# EAGLE board esp8266-incubator-panelized (EAGLE 6.4)
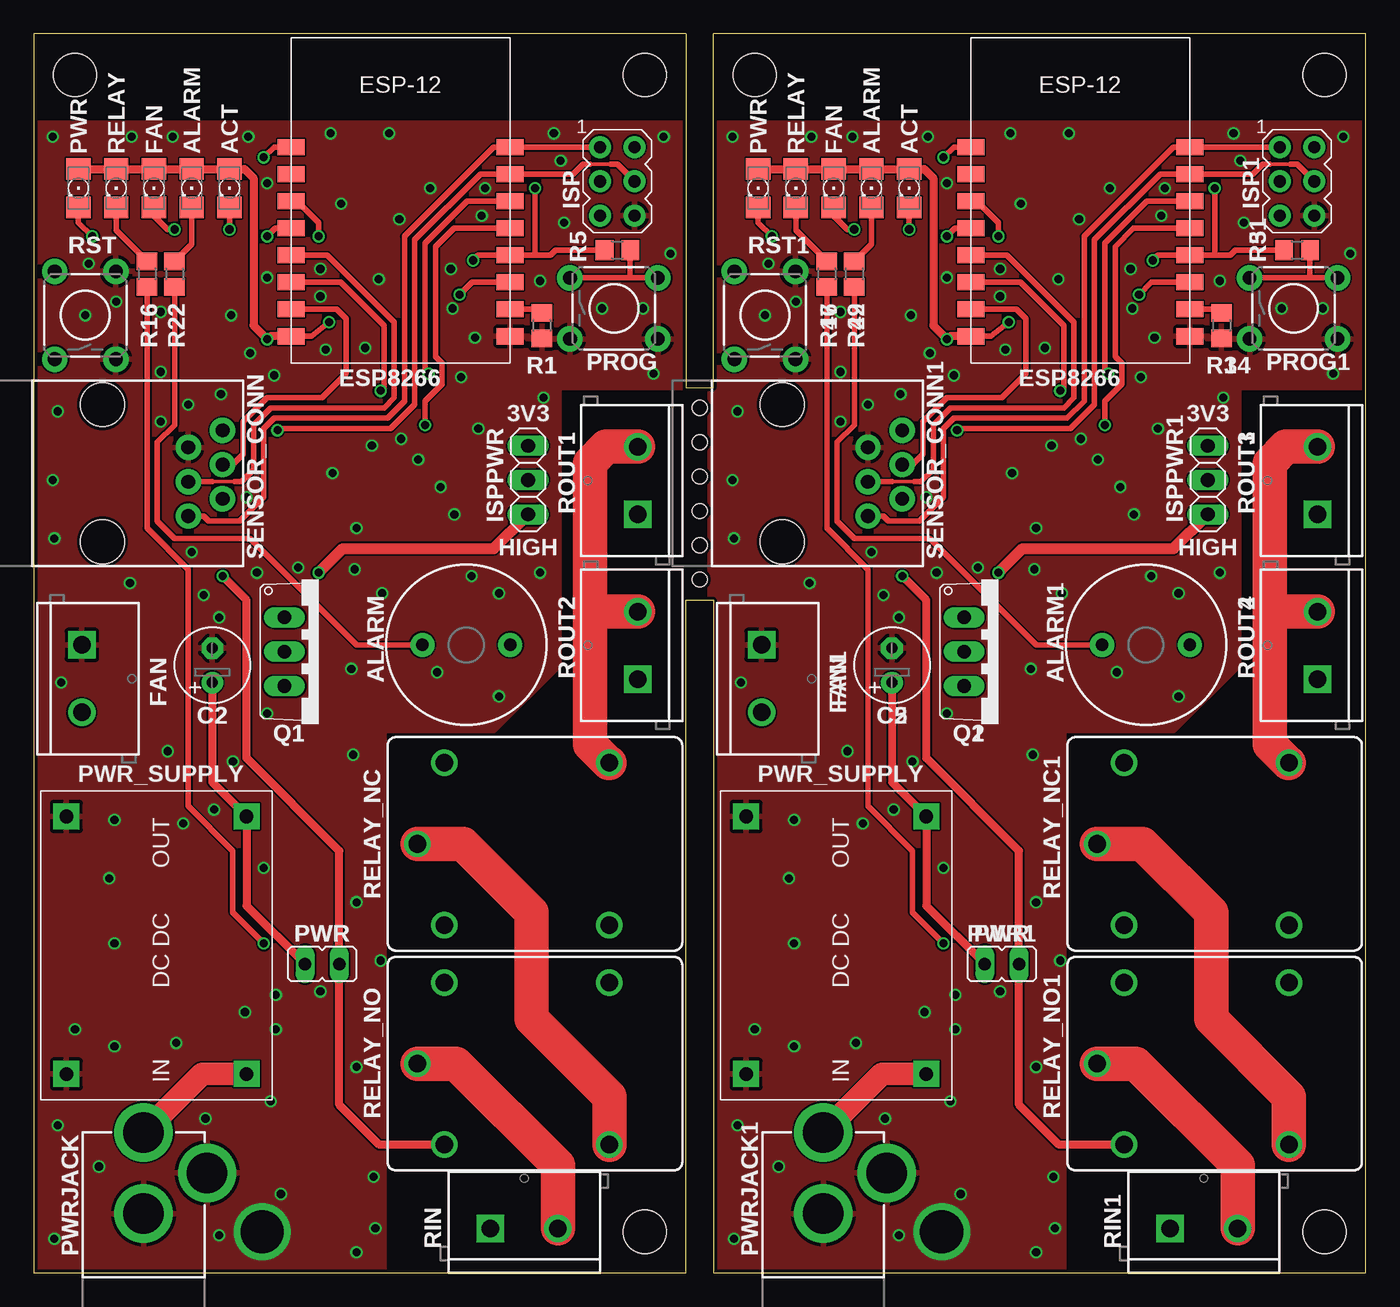
[diagram p0: board, top side]
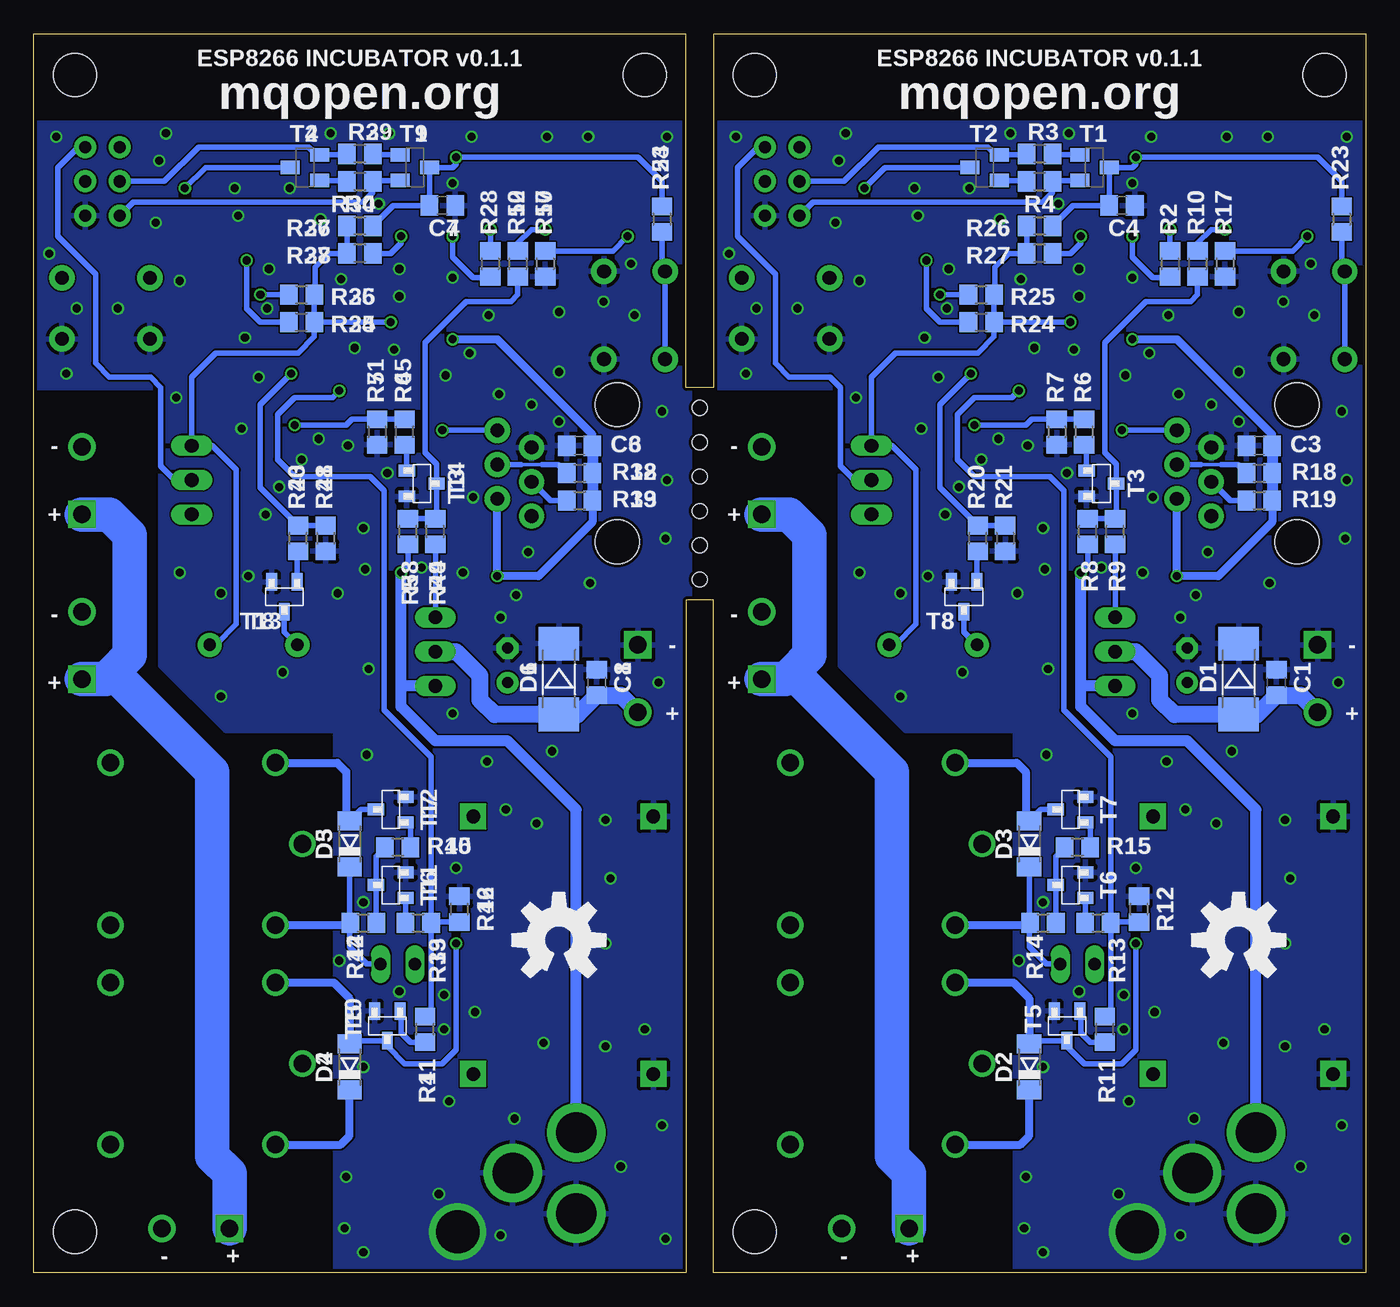
[diagram p1: board, bottom side, seen from below]

Size 98.55 x 91.69 mm. Coordinates in mm from the lower left corner, seen from the top.
Outline: 0,0 48.26,0 48.26,49.78 50.29,49.78 50.29,0 98.55,0 98.55,91.69 50.29,91.69 50.29,65.53 48.26,65.53 48.26,91.69 0,91.69 0,0
Copper layers (1*16): Top 0.035mm / dielectric 1.5mm / Bottom 0.035mm
Design rules "dirt_cheap_dirty_boards.v1": minimum track width 5mil, minimum drill 12mil, track to track 5mil, track to pad 5mil, pad to pad 5mil, via to via 5mil, smd to smd 0mil, copper to edge 10mil, drill to drill 10mil, minimum pad ring 10mil, minimum via ring 6mil, stop-mask expansion 2mil, vias tented up to drill 25mil, thermal gap 10mil
Holes 3.2 mm at 3.05,88.65 45.21,88.65 45.21,3.05 53.34,88.65 95.5,88.65 95.5,3.05
Holes 1.1 mm at 49.28,64.01 49.28,61.47 49.28,58.93 49.28,56.39 49.28,53.85 49.28,51.31

## Footprints (pad centres in the part's own frame; a part is rotated, then mirrored left to right if it is on the bottom)
1206 = smd 1.6 x 1.803: A -1.422,0; C 1.422,0
BUZZER-12MM = drill 0.9 pad 1.778: + 3.25,0; - -3.25,0
C0805 = smd 1.3 x 1.5: 1 -0.95,0; 2 0.95,0
E2,5-6 = drill 0.813 pad 1.6: + -1.27,0 | drill 0.813 pad 1.6 octagon: - 1.27,0
MELF-MLL41 = smd 2.5 x 3: A 2.625,0; C -2.625,0
SOD80C = smd 1.4 x 1.8: A 1.7,0; C -1.7,0
ESP8266-ESP12 = smd 2 x 1.2: 1 16.2,2; 2 16.2,4; 3 16.2,6; 4 16.2,8; 5 16.2,10; 6 16.2,12; 7 16.2,14; 8 16.2,16; 9 0,16; 10 0,14; 11 0,12; 12 0,10; 13 0,8; 14 0,6; 15 0,4; 16 0,2
SCREWTERMINAL-5MM-2 = drill 1.3 pad 2.032 square: 1 0,0 | drill 1.3 pad 2.032: 2 5,0
AVRISP = drill 0.9 pad 1.626: 1 -1.27,2.54; 2 1.27,2.54; 3 -1.27,0; 4 1.27,0; 5 -1.27,-2.54; 6 1.27,-2.54
1X03 = drill 1.016 long: 1 -2.54,0; 2 0,0; 3 2.54,0
TACTILE-PTH = drill 1.016 pad 1.88: 1 -3.251,2.261; 2 3.251,2.261; 3 -3.251,-2.261; 4 3.251,-2.261
JP1 = drill 0.914 long: 1 0,-1.27; 2 0,1.27
DC-DC = drill 1 pad 1.93 square: P$1 1.27,1.27; P$2 20.32,1.27; P$3 1.27,14.605; P$4 20.32,14.605
POWER_JACK_PTH = drill 2.997 pad 4.318: GND 0,7.7; GNDBREAK 4.7,10.7; PWR 0,13.7
TO220V = drill 1.016 long: 1 -2.54,-2.54; 2 0,-2.54; 3 2.54,-2.54
R0805 = smd 1.3 x 1.5: 1 -0.95,0; 2 0.95,0
JS-M = drill 1.3: 1 6.7,6; 2 6.7,-6; C 8.7,0; NC -5.5,-6; NO -5.5,6
RJ11-6 = drill 1.016 pad 1.88: 1 -3.175,8.89; 2 -1.905,6.35; 3 -0.635,8.89; 4 0.635,6.35; 5 1.905,8.89; 6 3.175,6.35 | hole 3.251: -5.08,0; 5.08,0
SOT23-BEC = smd 1 x 1.4: B -0.95,-1.1; C 0,1.1; E 0.95,-1.1
SOT23 = smd 1.3 x 0.9: 1 -1.1,0.95; 2 -1.1,-0.95; 3 1.1,0

## Placement (x,y rotation side)
ACT_LED  RED  [1206]  14.48,80.26 270 top
ACT_LED1  RED  [1206]  64.77,80.26 270 top
ALARM  BUZZERPTH  [BUZZER-12MM]  32,46.48 0 top
ALARM1  BUZZERPTH  [BUZZER-12MM]  82.3,46.48 0 top
ALARM_LED  RED  [1206]  11.68,80.26 270 top
ALARM_LED1  RED  [1206]  61.98,80.26 270 top
C1  1000nF  [C0805]  6.6,43.69 270 bottom
C2  220uF  [E2,5-6]  13.21,44.96 90 top
C3  100nF  [C0805]  7.87,61.21 0 bottom
C4  100nF  [C0805]  18.03,78.99 180 bottom
C5  220uF  [E2,5-6]  63.5,44.96 90 top
C6  100nF  [C0805]  58.17,61.21 0 bottom
C7  100nF  [C0805]  68.33,78.99 180 bottom
C8  1000nF  [C0805]  56.9,43.69 270 bottom
D1  1N4007  [MELF-MLL41]  9.4,43.94 270 bottom
D2  LL4148  [SOD80C]  24.89,15.24 90 bottom
D3  LL4148  [SOD80C]  24.89,31.75 90 bottom
D4  LL4148  [SOD80C]  75.18,15.24 90 bottom
D5  LL4148  [SOD80C]  75.18,31.75 90 bottom
D6  1N4007  [MELF-MLL41]  59.69,43.94 270 bottom
ESP1  ESP8266_ESP-12  [ESP8266-ESP12]  69.34,67.31 0 top
ESP8266  ESP8266_ESP-12  [ESP8266-ESP12]  19.05,67.31 0 top
FAN  [SCREWTERMINAL-5MM-2]  3.56,46.48 270 top
FAN1  [SCREWTERMINAL-5MM-2]  53.85,46.48 270 top
FAN_LED  RED  [1206]  8.89,80.26 270 top
FAN_LED1  RED  [1206]  59.18,80.26 270 top
ISP  AVRISP-6  [AVRISP]  43.18,80.77 0 top
ISP1  AVRISP-6  [AVRISP]  93.47,80.77 0 top
ISPPWR  [1X03]  36.58,58.67 270 top
ISPPWR1  [1X03]  86.87,58.67 270 top
PROG  [TACTILE-PTH]  42.93,71.37 0 top
PROG1  [TACTILE-PTH]  93.22,71.37 0 top
PWR  [JP1]  21.34,22.86 270 top
PWR1  [JP1]  71.63,22.86 270 top
PWR_LED  RED  [1206]  3.3,80.26 270 top
PWR_LED1  RED  [1206]  53.59,80.26 270 top
PWR_SUPPLY  DC-DC-SMALL  [DC-DC]  17.02,13.46 90 top
PWR_SUPPLY1  DC-DC-SMALL  [DC-DC]  67.31,13.46 90 top
PWRJACK  POWER_JACKPTH  [POWER_JACK_PTH]  8.13,-3.3 0 top
PWRJACK1  POWER_JACKPTH  [POWER_JACK_PTH]  58.42,-3.3 0 top
Q1  IRF9540N  [TO220V]  21.08,45.97 270 top
Q2  IRF9540N  [TO220V]  71.37,45.97 270 top
R1  12K  [R0805]  37.59,70.1 270 top
R2  82R  [R0805]  14.48,74.68 270 bottom
R3  12K  [R0805]  24.13,82.8 180 bottom
R4  12K  [R0805]  24.13,80.77 0 bottom
R5  470R  [R0805]  43.18,75.69 0 top
R6  100R  [R0805]  20.83,62.23 90 bottom
R7  10K  [R0805]  22.86,62.23 270 bottom
R8  10K  [R0805]  20.57,54.86 90 bottom
R9  100R  [R0805]  18.54,54.86 90 bottom
R10  1K  [R0805]  12.45,74.68 270 bottom
R11  100R  [R0805]  19.3,18.03 90 bottom
R12  10K  [R0805]  16.76,26.92 90 bottom
R13  100R  [R0805]  19.81,25.91 0 bottom
R14  10K  [R0805]  23.88,25.91 0 bottom
R15  100R  [R0805]  21.34,31.5 180 bottom
R16  1K  [R0805]  8.38,73.91 270 top
R17  82R  [R0805]  10.41,74.68 270 bottom
R18  10K  [R0805]  7.87,59.18 0 bottom
R19  10K  [R0805]  7.87,57.15 0 bottom
R20  100R  [R0805]  28.7,54.36 90 bottom
R21  10K  [R0805]  26.67,54.36 270 bottom
R22  1K  [R0805]  10.41,73.91 270 top
R23  470R  [R0805]  1.78,77.98 270 bottom
R24  12K  [R0805]  28.45,70.36 0 bottom
R25  12K  [R0805]  28.45,72.39 0 bottom
R26  12K  [R0805]  24.13,77.47 180 bottom
R27  12K  [R0805]  24.13,75.44 180 bottom
R28  82R  [R0805]  64.77,74.68 270 bottom
R29  12K  [R0805]  74.42,82.8 180 bottom
R30  12K  [R0805]  74.42,80.77 0 bottom
R31  470R  [R0805]  93.47,75.69 0 top
R32  10K  [R0805]  58.17,59.18 0 bottom
R33  10K  [R0805]  58.17,57.15 0 bottom
R34  12K  [R0805]  87.88,70.1 270 top
R35  12K  [R0805]  78.74,70.36 0 bottom
R36  12K  [R0805]  78.74,72.39 0 bottom
R37  12K  [R0805]  74.42,77.47 180 bottom
R38  12K  [R0805]  74.42,75.44 180 bottom
R39  100R  [R0805]  70.1,25.91 0 bottom
R40  100R  [R0805]  71.63,31.5 180 bottom
R41  100R  [R0805]  69.6,18.03 90 bottom
R42  10K  [R0805]  74.17,25.91 0 bottom
R43  100R  [R0805]  78.99,54.36 90 bottom
R44  100R  [R0805]  68.83,54.86 90 bottom
R45  100R  [R0805]  71.12,62.23 90 bottom
R46  10K  [R0805]  67.06,26.92 90 bottom
R47  1K  [R0805]  58.67,73.91 270 top
R48  10K  [R0805]  76.96,54.36 270 bottom
R49  1K  [R0805]  60.71,73.91 270 top
R50  82R  [R0805]  60.71,74.68 270 bottom
R51  10K  [R0805]  73.15,62.23 270 bottom
R52  1K  [R0805]  62.74,74.68 270 bottom
R53  10K  [R0805]  70.87,54.86 90 bottom
R54  470R  [R0805]  52.07,77.98 270 bottom
RELAY_LED  RED  [1206]  6.1,80.26 270 top
RELAY_LED1  RED  [1206]  56.39,80.26 270 top
RELAY_NC  JS-M1-12V-5  [JS-M]  37.08,31.75 180 top
RELAY_NC1  JS-M1-12V-5  [JS-M]  87.38,31.75 180 top
RELAY_NO  JS-M1-12V-5  [JS-M]  37.08,15.49 180 top
RELAY_NO1  JS-M1-12V-5  [JS-M]  87.38,15.49 180 top
RIN  [SCREWTERMINAL-5MM-2]  33.78,3.3 0 top
RIN1  [SCREWTERMINAL-5MM-2]  84.07,3.3 0 top
ROUT1  [SCREWTERMINAL-5MM-2]  44.7,56.13 90 top
ROUT2  [SCREWTERMINAL-5MM-2]  44.7,43.94 90 top
ROUT3  [SCREWTERMINAL-5MM-2]  95,56.13 90 top
ROUT4  [SCREWTERMINAL-5MM-2]  95,43.94 90 top
RST  [TACTILE-PTH]  3.81,70.87 90 top
RST1  [TACTILE-PTH]  54.1,70.87 90 top
SENSOR_CONN  RJ11  [RJ11-6]  5.08,59.18 270 top
SENSOR_CONN1  RJ11  [RJ11-6]  55.37,59.18 270 top
T1  S8050  [SOT23-BEC]  20.07,81.79 270 bottom
T2  S8050  [SOT23-BEC]  28.19,81.79 90 bottom
T3  BSS138L  [SOT23]  19.56,58.42 0 bottom
T4  S8050  [SOT23-BEC]  78.49,81.79 90 bottom
T5  BSS138L  [SOT23]  22.1,18.29 270 bottom
T6  BSS138L  [SOT23]  21.84,28.7 180 bottom
T7  BSS138L  [SOT23]  21.84,34.29 180 bottom
T8  BSS138L  [SOT23]  29.72,50.04 270 bottom
T9  S8050  [SOT23-BEC]  70.36,81.79 270 bottom
T10  BSS138L  [SOT23]  72.39,18.29 270 bottom
T11  BSS138L  [SOT23]  72.14,28.7 180 bottom
T12  BSS138L  [SOT23]  72.14,34.29 180 bottom
T13  BSS138L  [SOT23]  80.01,50.04 270 bottom
T14  BSS138L  [SOT23]  69.85,58.42 0 bottom
U$1  OSHW-LOGOL  [OSHW-LOGO-L]  59.69,24.64 0 bottom
U$1000  OSHW-LOGOL  [OSHW-LOGO-L]  9.4,24.64 0 bottom

## Library data of the parts
ACT_LED ACT_LED1 ALARM_LED ALARM_LED1 FAN_LED FAN_LED1 PWR_LED PWR_LED1 RELAY_LED RELAY_LED1 = led
ALARM ALARM1 U$1 U$1000 = SparkFun
C1-C8 R1-R54 = rcl
D1-D6 = diode
ESP1 ESP8266 = ESP8266-ESP12
FAN FAN1 RIN RIN1 ROUT1-ROUT4 = SparkFun-Connectors; STOREFRONT_ID: PRT-08432
ISP ISP1 Q1 Q2 = adafruit
ISPPWR ISPPWR1 = pinhead
PROG PROG1 RST RST1 = SparkFun-Retired
PWR PWR1 = jumper
PWR_SUPPLY PWR_SUPPLY1 = OK1CDJ-E6
PWRJACK PWRJACK1 = SparkFun-Connectors; PROD_ID: CONN-08197
RELAY_NC RELAY_NC1 RELAY_NO RELAY_NO1 = relay
SENSOR_CONN SENSOR_CONN1 = SparkFun-Connectors; PROD_ID: CONN-08590
T1 T2 T4 T9 = transistor
T3 T5-T8 T10-T14 = we-transistor

## Nets
+3V1: ACT_LED1.A ALARM1.+ ALARM_LED1.A C6.2 D4.C D5.C ESP1.16 FAN_LED1.A ISPPWR1.1 PWR1.2 PWR_LED1.A R32.2 R33.2 R35.2 R36.2 R37.2 R38.2 R42.1 RELAY_LED1.A RELAY_NC1.1 RELAY_NO1.1 SENSOR_CONN1.5
+3V3: ACT_LED.A ALARM.+ ALARM_LED.A C3.2 D2.C D3.C ESP8266.16 FAN_LED.A ISPPWR.1 PWR.2 PWR_LED.A R14.1 R18.2 R19.2 R24.2 R25.2 R26.2 R27.2 RELAY_LED.A RELAY_NC.1 RELAY_NO.1 SENSOR_CONN.5
+12V: ISPPWR.3 PWR_SUPPLY.P$1 PWRJACK.PWR Q1.3 R8.1
+12V1: ISPPWR1.3 PWR_SUPPLY1.P$1 PWRJACK1.PWR Q2.3 R53.1
BUZZER: ESP8266.6 R20.2 R21.1
BUZZER1: ESP1.6 R43.2 R48.1
C1: RIN1.1 ROUT3.1 ROUT4.1
C230: RIN.1 ROUT1.1 ROUT2.1
DTR: ISP.3 R3.2 T2.E
DTR1: ISP1.3 R29.2 T4.E
EN: ESP8266.11 R27.1
EN1: ESP1.11 R38.1
FAN: ESP8266.5 R6.2 R7.1
FAN1: ESP1.5 R45.2 R51.1
GND: C1.1 C2.- C3.1 C4.1 D1.C ESP8266.1 FAN.1 ISP.6 PROG.3 PROG.4 PWR_SUPPLY.P$3 PWR_SUPPLY.P$4 PWRJACK.GND PWRJACK.GNDBREAK R1.2 R7.2 R12.2 R17.2 R21.2 RST.3 RST.4 SENSOR_CONN.2 T3.2 T5.2 T6.2 T7.2 T8.2
GND1: C5.- C6.1 C7.1 C8.1 D6.C ESP1.1 FAN1.1 ISP1.6 PROG1.3 PROG1.4 PWR_SUPPLY1.P$3 PWR_SUPPLY1.P$4 PWRJACK1.GND PWRJACK1.GNDBREAK R34.2 R46.2 R48.2 R50.2 R51.2 RST1.3 RST1.4 SENSOR_CONN1.2 T10.2 T11.2 T12.2 T13.2 T14.2
GPIO0: ESP8266.4 R5.1 R24.1 T2.C
GPIO1: ESP1.4 R31.1 R35.1 T4.C
GPIO2: ESP8266.3 R25.1
GPIO3: ESP1.12 R28.2
GPIO4: ESP1.13 R33.1 SENSOR_CONN1.4
GPIO5: ESP1.15 R32.1 SENSOR_CONN1.3
GPIO6: ESP1.3 R36.1
GPIO13: ESP8266.15 R18.1 SENSOR_CONN.3
GPIO14: ESP8266.13 R19.1 SENSOR_CONN.4
GPIO16: ESP8266.12 R2.2
N$1: ACT_LED.C R2.1
N$2: C2.+ PWR.1 PWR_SUPPLY.P$2
N$3: R3.1 T1.B
N$4: PROG.1 PROG.2 R5.2
N$5: ESP8266.2 R1.1
N$6: ISP.2 ISPPWR.2
N$7: R4.1 T2.B
N$8: R20.1 T8.1
N$9: D2.A R16.2 RELAY_NO.2 T5.3
N$10: ACT_LED1.C R28.1
N$11: R11.1 T5.1
N$12: R13.1 T6.1
N$13: R14.2 R15.2 T6.3
N$14: R15.1 T7.1
N$15: R16.1 RELAY_LED.C
N$16: D3.A RELAY_NC.2 T7.3
N$17: RELAY_NC.C RELAY_NO.NO
N$18: Q1.1 R9.1
N$19: ALARM_LED.C R22.1
N$20: ALARM.- R22.2 T8.3
N$21: PWR_LED.C R17.1
N$22: FAN_LED.C R10.1
N$23: R6.1 T3.1
N$24: R8.2 R9.2 R10.2 T3.3
N$25: C1.2 D1.A FAN.2 Q1.2
N$26: R23.2 RST.1 RST.2
N$27: R29.1 T9.B
N$28: R30.1 T4.B
N$29: PROG1.1 PROG1.2 R31.2
N$30: C5.+ PWR1.1 PWR_SUPPLY1.P$2
N$31: ESP1.2 R34.1
N$32: ISP1.2 ISPPWR1.2
N$33: R41.1 T10.1
N$34: D4.A R47.2 RELAY_NO1.2 T10.3
N$35: R39.1 T11.1
N$36: R40.2 R42.2 T11.3
N$37: R40.1 T12.1
N$38: RELAY_NC1.C RELAY_NO1.NO
N$39: Q2.1 R44.1
N$40: D5.A RELAY_NC1.2 T12.3
N$41: R47.1 RELAY_LED1.C
N$42: R43.1 T13.1
N$43: ALARM_LED1.C R49.1
N$44: ALARM1.- R49.2 T13.3
N$45: PWR_LED1.C R50.1
N$46: R45.1 T14.1
N$47: FAN_LED1.C R52.1
N$48: R44.2 R52.2 R53.2 T14.3
N$49: C8.2 D6.A FAN1.2 Q2.2
N$50: R54.2 RST1.1 RST1.2
NRST: C4.2 ESP8266.9 R23.1 R26.1 T1.C
NRST1: C7.2 ESP1.9 R37.1 R54.1 T9.C
P1: RELAY_NO1.C RIN1.2
P230: RELAY_NO.C RIN.2
R1: RELAY_NC1.NC ROUT3.2 ROUT4.2
R230: RELAY_NC.NC ROUT1.2 ROUT2.2
RELAY: ESP8266.14 R11.2 R12.1 R13.2
RELAY1: ESP1.14 R39.2 R41.2 R46.1
RST: ISP.5 R4.2 T1.E
RST1: ISP1.5 R30.2 T9.E
RXD: ESP8266.7 ISP.4 SENSOR_CONN.1
RXD1: ESP1.7 ISP1.4 SENSOR_CONN1.1
TXD: ESP8266.8 ISP.1 SENSOR_CONN.6
TXD1: ESP1.8 ISP1.1 SENSOR_CONN1.6

## Tracks (layer width: path | path; a pad name or v marks a point on that pad's centre or on a via)
+3V1  (via drill 0.6)
  Top 0.406: ESP1.16 70.83,69.31 v72.14,70.36
  Top 0.61: v64.26,51.56 66.04,49.78 66.04,38.1 72.9,31.24 PWR1.2 72.9,12.45 75.85,9.49 RELAY_NO1.1 | ESP1.16 67.79,69.31 v67.56,69.09 66.55,70.1 66.55,81.03 65.89,81.69 ACT_LED1.A ALARM_LED1.A FAN_LED1.A RELAY_LED1.A PWR_LED1.A
  Bottom 0.406: v72.14,70.36 R35.2 | R35.2 R36.2 77.72,72.46 77.72,74.42 76.71,75.44 R38.2 R37.2 | R35.2 77.79,69.28 78.99,68.07 85.09,68.07 86.87,66.29 ISPPWR1.1 85.34,61.21 83.57,59.44 83.57,48.01 85.09,46.48 ALARM1.+ | D5.C 75.18,25.97 R42.1 75.18,25.84 75.18,24.13 73.91,22.86 PWR1.2
  Bottom 0.61: SENSOR_CONN1.5 v64.26,51.56 61.21,51.56 57.22,55.56 R33.2 | C6.2 57.22,62.04 64.26,69.09 v67.56,69.09 | RELAY_NO1.1 75.85,9.49 75.18,10.16 D4.C | RELAY_NC1.1 75.28,25.75 R42.1
  Bottom 0.813: C6.2 R32.2 R33.2
+3V3  (via drill 0.6)
  Top 0.406: ESP8266.16 20.54,69.31 v21.84,70.36
  Top 0.61: v13.97,51.56 15.75,49.78 15.75,38.1 22.61,31.24 PWR.2 22.61,12.45 25.56,9.49 RELAY_NO.1 | ESP8266.16 17.49,69.31 v17.27,69.09 16.26,70.1 16.26,81.03 15.6,81.69 ACT_LED.A ALARM_LED.A FAN_LED.A RELAY_LED.A PWR_LED.A
  Bottom 0.406: v21.84,70.36 R24.2 | R24.2 R25.2 27.43,72.46 27.43,74.42 26.42,75.44 R27.2 R26.2 | R24.2 27.5,69.28 28.7,68.07 34.8,68.07 36.58,66.29 ISPPWR.1 35.05,61.21 33.27,59.44 33.27,48.01 34.8,46.48 ALARM.+ | D3.C 24.89,25.97 R14.1 24.89,25.84 24.89,24.13 23.62,22.86 PWR.2
  Bottom 0.61: SENSOR_CONN.5 v13.97,51.56 10.92,51.56 6.92,55.56 R19.2 | C3.2 6.92,62.04 13.97,69.09 v17.27,69.09 | RELAY_NO.1 25.56,9.49 24.89,10.16 D2.C | RELAY_NC.1 24.98,25.75 R14.1
  Bottom 0.813: C3.2 R18.2 R19.2
+12V  (via drill 0.6)
  Top 0.813: v21.08,51.82 22.86,53.59 34.04,53.59 ISPPWR.3
  Top 1.676: PWRJACK.PWR 8.13,10.41 12.45,14.73 PWR_SUPPLY.P$1
  Bottom 0.406: R8.1 20.57,52.32 v21.08,51.82
  Bottom 0.813: 21.08,43.43 21.08,41.91 18.54,39.37 13.21,39.37 8.13,34.29 PWRJACK.PWR | 21.08,43.43 v21.08,51.82 | Q1.3 21.08,43.43
+12V1  (via drill 0.6)
  Top 0.813: v71.37,51.82 73.15,53.59 84.33,53.59 ISPPWR1.3
  Top 1.676: PWRJACK1.PWR 58.42,10.41 62.74,14.73 PWR_SUPPLY1.P$1
  Bottom 0.406: R53.1 70.87,52.32 v71.37,51.82
  Bottom 0.813: 71.37,43.43 71.37,41.91 68.83,39.37 63.5,39.37 58.42,34.29 PWRJACK1.PWR | 71.37,43.43 v71.37,51.82 | Q2.3 71.37,43.43
BUZZER  (via drill 0.6)
  Top 0.406: v29.21,66.55 28.96,66.8 28.96,76.2 32.07,79.31 ESP8266.6
  Bottom 0.406: v29.21,66.55 31.5,64.26 31.5,58.1 R20.2 R21.1
BUZZER1  (via drill 0.6)
  Top 0.406: v79.5,66.55 79.25,66.8 79.25,76.2 82.36,79.31 ESP1.6
  Bottom 0.406: v79.5,66.55 81.79,64.26 81.79,58.1 R43.2 R48.1
C1
  Bottom 2.54: RIN1.1 84.07,7.37 85.34,8.64 85.34,37.08 92.71,44.45 | ROUT4.1 93.22,43.94 92.71,44.45 | 92.71,44.45 91.44,45.72 91.44,54.61 92.96,56.13 ROUT3.1
C230
  Bottom 2.54: RIN.1 33.78,7.37 35.05,8.64 35.05,37.08 42.42,44.45 | ROUT2.1 42.93,43.94 42.42,44.45 | 42.42,44.45 41.15,45.72 41.15,54.61 42.67,56.13 ROUT1.1
DTR
  Bottom 0.406: R3.2 25.15,82.74 T2.E 27.37,82.74 27.94,83.31 36.07,83.31 38.61,80.77 ISP.3
DTR1
  Bottom 0.406: R29.2 75.44,82.74 T4.E 77.66,82.74 78.23,83.31 86.36,83.31 88.9,80.77 ISP1.3
EN  (via drill 0.6)
  Top 0.406: ESP8266.11 19.5,79.31 21.08,77.72 v21.08,76.71
  Bottom 0.406: v21.08,76.71 21.08,76.2 21.84,75.44 R27.1
EN1  (via drill 0.6)
  Top 0.406: ESP1.11 69.79,79.31 71.37,77.72 v71.37,76.71
  Bottom 0.406: v71.37,76.71 71.37,76.2 72.14,75.44 R38.1
FAN  (via drill 0.6)
  Top 0.406: v28.96,62.74 28.96,64.52 30.23,65.79 30.23,67.31 29.72,67.82 29.72,75.95 31.08,77.31 ESP8266.5
  Bottom 0.406: R6.2 R7.1 24.7,63.18 25.15,62.74 v28.96,62.74
FAN1  (via drill 0.6)
  Top 0.406: v79.25,62.74 79.25,64.52 80.52,65.79 80.52,67.31 80.01,67.82 80.01,75.95 81.37,77.31 ESP1.5
  Bottom 0.406: R45.2 R51.1 75,63.18 75.44,62.74 v79.25,62.74
GND  (via drill 0.6, 3.2)
  other vias: 17.02,29.97 17.27,41.4 17.91,20.57 5.59,29.21 3.05,18.03 12.7,11.43 23.88,15.24 25.15,7.11 23.88,27.43 18.29,5.84 17.53,12.7 25.65,23.11 13.72,2.79 4.83,7.87 1.78,10.92 1.52,2.54 23.88,1.52 23.62,38.35 19.56,52.2 9.91,38.61 2.03,43.69 1.52,54.36 1.78,63.75 11.43,64.26 7.11,51.05 16.51,51.82 27.18,61.72 28.45,60.2 38.99,82.3 23.88,55.12 21.59,68.33 16,68.07 9.4,71.12 6.1,71.88 4.06,74.68 21.21,74.3 21.21,72.26 24.51,68.45 25.53,73.53 32.64,69.22 30.99,71.37 30.86,74.3 33.15,78.23 33.4,80.26 29.34,80.26 27.05,77.98 21.97,84.33 26.29,84.33 17.27,80.64 15.88,84.07 7.24,84.07 10.29,84.07 14.61,70.87 1.4,84.07 39.24,77.72 46.61,84.07 38.48,84.33 47.12,75.44 45.09,71.37 42.04,71.37 37.47,73.41 37.72,64.77 45.85,66.55 31.62,66.29 30.1,58.17 31.11,56.13 32.89,62.48 37.47,51.82 34.42,42.67 34.42,50.29 32.38,51.56 23.75,52.07 23.5,44.7 25.78,50.29 13.34,34.29 11.05,33.27 15.62,19.3 10.54,17.02 5.97,24.38 5.97,16.76 5.97,33.53 21.21,20.83 25.27,3.3 25.02,61.21 13.84,65.02 9.4,66.67 3.81,70.87 1.4,58.67 17.27,73.66 17.78,66.42 22.73,79.12 16.89,3.05 22.1,59.18 12.57,50.16 29.84,44.45 14.73,37.85 13.72,48.51 11.68,53.34 17.91,18.03 9.4,62.99 15.75,57.4
  pour Bottom: -0.25,85.09 -0.25,-0.25 25.91,-0.25 25.91,40.13 34.04,40.13 38.86,44.96 38.86,65.53 48.51,65.53 48.51,85.09
  pour Top: -0.25,85.09 -0.25,-0.25 25.91,-0.25 25.91,40.13 34.04,40.13 38.86,44.96 38.86,65.53 48.51,65.53 48.51,85.09
GND1  (via drill 0.6, 3.2)
  other vias: 67.31,29.97 67.56,41.4 68.2,20.57 55.88,29.21 53.34,18.03 62.99,11.43 74.17,15.24 75.44,7.11 74.17,27.43 68.58,5.84 67.82,12.7 75.95,23.11 64.01,2.79 55.12,7.87 52.07,10.92 51.82,2.54 74.17,1.52 73.91,38.35 69.85,52.2 60.2,38.61 52.32,43.69 51.82,54.36 52.07,63.75 61.72,64.26 57.4,51.05 66.8,51.82 77.47,61.72 78.74,60.2 89.28,82.3 74.17,55.12 71.88,68.33 66.29,68.07 59.69,71.12 56.39,71.88 54.36,74.68 71.5,74.3 71.5,72.26 74.8,68.45 75.82,73.53 82.93,69.22 81.28,71.37 81.15,74.3 83.44,78.23 83.69,80.26 79.63,80.26 77.34,77.98 72.26,84.33 76.58,84.33 67.56,80.64 66.17,84.07 57.53,84.07 60.58,84.07 64.9,70.87 51.69,84.07 89.53,77.72 96.9,84.07 88.77,84.33 97.41,75.44 95.38,71.37 92.33,71.37 87.76,73.41 88.01,64.77 96.14,66.55 81.92,66.29 80.39,58.17 81.41,56.13 83.19,62.48 87.76,51.82 84.71,42.67 84.71,50.29 82.68,51.56 74.04,52.07 73.79,44.7 76.07,50.29 63.63,34.29 61.34,33.27 65.91,19.3 60.83,17.02 56.26,24.38 56.26,16.76 56.26,33.53 71.5,20.83 75.56,3.3 75.31,61.21 64.14,65.02 59.69,66.67 54.1,70.87 51.69,58.67 67.56,73.66 68.07,66.42 73.03,79.12 67.18,3.05 72.39,59.18 62.87,50.16 80.14,44.45 65.02,37.85 64.01,48.51 61.98,53.34 68.2,18.03 59.69,62.99 66.04,57.4
  pour Bottom: 50.04,85.09 50.04,-0.25 76.2,-0.25 76.2,40.13 84.33,40.13 89.15,44.96 89.15,65.53 98.81,65.53 98.81,85.09
  pour Top: 50.04,85.09 50.04,-0.25 76.2,-0.25 76.2,40.13 84.33,40.13 89.15,44.96 89.15,65.53 98.81,65.53 98.81,85.09
GPIO0  (via drill 0.6)
  Top 0.406: 37.08,75.31 ESP8266.4 32.89,75.31 v32.51,74.93 | 37.08,75.31 38.23,75.31 38.61,75.69 R5.1 | v37.08,80.26 37.08,75.31
  Bottom 0.406: T2.C 35.56,81.79 v37.08,80.26 | v32.51,74.93 32.51,71.37 31.5,70.36 R24.1
GPIO1  (via drill 0.6)
  Top 0.406: 87.38,75.31 ESP1.4 83.18,75.31 v82.8,74.93 | 87.38,75.31 88.52,75.31 88.9,75.69 R31.1 | v87.38,80.26 87.38,75.31
  Bottom 0.406: T4.C 85.85,81.79 v87.38,80.26 | v82.8,74.93 82.8,71.37 81.79,70.36 R35.1
GPIO2  (via drill 0.6)
  Top 0.406: ESP8266.3 32.42,73.31 v31.5,72.39
  Bottom 0.406: v31.5,72.39 R25.1
GPIO3  (via drill 0.6)
  Top 0.406: ESP1.12 68.17,77.31 v67.56,76.71
  Bottom 0.406: v67.56,76.71 67.56,75.18 66.04,73.66 64.84,73.66 R28.2
GPIO4
  Top 0.254: 63.5,58.55 65.15,58.55
  Top 0.406: SENSOR_CONN1.4 63.5,58.55 | 65.15,58.55 65.66,58.55 66.55,59.44 66.55,62.74 67.82,64.01 76.2,64.01 76.96,64.77 76.96,70.36 72.01,75.31 ESP1.13
  Bottom 0.406: R33.1 60.33,57.15 SENSOR_CONN1.4
GPIO5
  Top 0.406: SENSOR_CONN1.3 65.02,59.82 65.79,60.58 65.79,62.99 67.56,64.77 71.63,64.77 73.41,66.55 73.41,70.61 72.71,71.31 ESP1.15
  Bottom 0.254: 62.48,59.82 60.96,59.82
  Bottom 0.406: SENSOR_CONN1.3 62.48,59.82 | 60.96,59.82 59.75,59.82 R32.1
GPIO6  (via drill 0.6)
  Top 0.406: ESP1.3 82.71,73.31 v81.79,72.39
  Bottom 0.406: v81.79,72.39 R36.1
GPIO13
  Top 0.406: SENSOR_CONN.3 14.73,59.82 15.49,60.58 15.49,62.99 17.27,64.77 21.34,64.77 23.11,66.55 23.11,70.61 22.42,71.31 ESP8266.15
  Bottom 0.254: 12.19,59.82 10.67,59.82
  Bottom 0.406: SENSOR_CONN.3 12.19,59.82 | 10.67,59.82 9.46,59.82 R18.1
GPIO14
  Top 0.254: 13.21,58.55 14.86,58.55
  Top 0.406: SENSOR_CONN.4 13.21,58.55 | 14.86,58.55 15.37,58.55 16.26,59.44 16.26,62.74 17.53,64.01 25.91,64.01 26.67,64.77 26.67,70.36 21.72,75.31 ESP8266.13
  Bottom 0.406: R19.1 10.03,57.15 SENSOR_CONN.4
GPIO16  (via drill 0.6)
  Top 0.406: ESP8266.12 17.87,77.31 v17.27,76.71
  Bottom 0.406: v17.27,76.71 17.27,75.18 15.75,73.66 14.54,73.66 R2.2
N$1  (via drill 0.6)
  Top 0.406: ACT_LED.C v14.48,77.22
  Bottom 0.406: v14.48,77.22 R2.1
N$2
  Top 0.61: C2.+ 13.21,36.32 PWR_SUPPLY.P$2 15.75,27.18 PWR.1
N$3
  Bottom 0.406: T1.B 23.11,82.74 R3.1
N$4
  Top 0.406: PROG.1 44.2,73.64 | 44.2,73.64 PROG.2 | R5.2 44.13,73.7 44.2,73.64
N$5
  Top 0.406: ESP8266.2 37.34,71.31 R1.1
N$6
  Bottom 0.406: ISP.2 44.96,83.31 46.48,81.79 46.48,76.71 43.69,73.91 43.69,67.31 42.67,66.29 39.62,66.29 38.86,65.53 38.86,59.69 37.85,58.67 ISPPWR.2
N$7
  Bottom 0.406: T2.B 25.15,80.84 R4.1
N$8
  Bottom 0.406: T8.1 28.77,53.34 R20.1
N$9  (via drill 0.6)
  Top 0.406: R16.2 8.38,55.12 11.43,52.07 11.43,34.54 14.73,31.24 14.73,26.67 v17.02,24.38
  Bottom 0.406: 24.81,17.02 D2.A 24.64,17.19 T5.3 22.1,16.76 20.83,15.49 18.03,15.49 17.02,16.51 v17.02,24.38
  Bottom 0.61: RELAY_NO.2 26.07,21.49 24.89,20.32 D2.A
N$10  (via drill 0.6)
  Top 0.406: ACT_LED1.C v64.77,77.22
  Bottom 0.406: v64.77,77.22 R28.1
N$11
  Bottom 0.406: R11.1 20.39,17.08 21.08,17.78 21.08,19.32 T5.1
N$12
  Bottom 0.406: T6.1 20.74,25.93 R13.1
N$13
  Bottom 0.406: R15.2 22.94,30.84 T6.3 22.94,25.93 R14.2
N$14
  Bottom 0.406: R15.1 20.39,32.98 T7.1
N$15
  Top 0.406: RELAY_LED.C 6.1,77.15 R16.1
N$16
  Bottom 0.406: T7.3 24.05,34.29 D3.A
  Bottom 0.61: RELAY_NC.2 25.81,37.75 25.15,37.08 25.15,33.7 D3.A
N$17
  Top 2.54: RELAY_NO.NO 42.58,13.04 36.83,18.8 36.83,26.67 31.75,31.75 RELAY_NC.C
N$18
  Bottom 0.406: R9.1 Q1.1
N$19
  Top 0.406: ALARM_LED.C 11.68,76.13 R22.1
N$20
  Top 0.406: ALARM.- 23.88,46.48 16,54.36 10.41,54.36 9.14,55.63 9.14,61.47 10.41,62.74 R22.2
  Bottom 0.406: T8.3 29.72,47.45 ALARM.-
N$21  (via drill 0.6)
  Top 0.406: v4.32,76.71 3.3,77.72 PWR_LED.C
  Bottom 0.406: R17.1 5.4,75.63 v4.32,76.71
N$22  (via drill 0.6)
  Top 0.406: v10.41,77.22 9.91,77.22 8.89,78.23 FAN_LED.C
  Bottom 0.406: R10.1 12.45,76.2 11.43,77.22 v10.41,77.22
N$23
  Bottom 0.406: T3.1 20.66,61.11 R6.1
N$24
  Bottom 0.406: R8.2 R9.2 18.46,55.9 T3.3 18.46,59.86 19.3,60.71 19.3,68.83 16.26,71.88 12.95,71.88 12.45,72.39 R10.2
N$25
  Bottom 1.27: FAN.2 4.81,42.74 C1.2 8.03,41.32 D1.A 14.14,41.32 15.24,42.42 15.24,44.2 17.02,45.97 Q1.2
N$26
  Bottom 0.406: R23.2 1.78,74.35 RST.2 RST.1
N$27
  Bottom 0.406: T9.B 73.41,82.74 R29.1
N$28
  Bottom 0.406: T4.B 75.44,80.84 R30.1
N$29
  Top 0.406: PROG1.1 94.49,73.64 | 94.49,73.64 PROG1.2 | R31.2 94.42,73.7 94.49,73.64
N$30
  Top 0.61: C5.+ 63.5,36.32 PWR_SUPPLY1.P$2 66.04,27.18 PWR1.1
N$31
  Top 0.406: ESP1.2 87.63,71.31 R34.1
N$32
  Bottom 0.406: ISP1.2 95.25,83.31 96.77,81.79 96.77,76.71 93.98,73.91 93.98,67.31 92.96,66.29 89.92,66.29 89.15,65.53 89.15,59.69 88.14,58.67 ISPPWR1.2
N$33
  Bottom 0.406: R41.1 70.68,17.08 71.37,17.78 71.37,19.32 T10.1
N$34  (via drill 0.6)
  Top 0.406: R47.2 58.67,55.12 61.72,52.07 61.72,34.54 65.02,31.24 65.02,26.67 v67.31,24.38
  Bottom 0.406: 75.11,17.02 D4.A 74.94,17.19 T10.3 72.39,16.76 71.12,15.49 68.33,15.49 67.31,16.51 v67.31,24.38
  Bottom 0.61: RELAY_NO1.2 76.36,21.49 75.18,20.32 D4.A
N$35
  Bottom 0.406: T11.1 71.04,25.93 R39.1
N$36
  Bottom 0.406: R40.2 73.24,30.84 T11.3 73.24,25.93 R42.2
N$37
  Bottom 0.406: R40.1 70.68,32.98 T12.1
N$38
  Top 2.54: RELAY_NO1.NO 92.88,13.04 87.12,18.8 87.12,26.67 82.04,31.75 RELAY_NC1.C
N$39
  Bottom 0.406: R44.1 Q2.1
N$40
  Bottom 0.406: T12.3 74.34,34.29 D5.A
  Bottom 0.61: RELAY_NC1.2 76.1,37.75 75.44,37.08 75.44,33.7 D5.A
N$41
  Top 0.406: RELAY_LED1.C 56.39,77.15 R47.1
N$42
  Bottom 0.406: T13.1 79.06,53.34 R43.1
N$43
  Top 0.406: ALARM_LED1.C 61.98,76.13 R49.1
N$44
  Top 0.406: ALARM1.- 74.17,46.48 66.29,54.36 60.71,54.36 59.44,55.63 59.44,61.47 60.71,62.74 R49.2
  Bottom 0.406: T13.3 80.01,47.45 ALARM1.-
N$45  (via drill 0.6)
  Top 0.406: v54.61,76.71 53.59,77.72 PWR_LED1.C
  Bottom 0.406: R50.1 55.69,75.63 v54.61,76.71
N$46
  Bottom 0.406: T14.1 70.95,61.11 R45.1
N$47  (via drill 0.6)
  Top 0.406: v60.71,77.22 60.2,77.22 59.18,78.23 FAN_LED1.C
  Bottom 0.406: R52.1 62.74,76.2 61.72,77.22 v60.71,77.22
N$48
  Bottom 0.406: R53.2 R44.2 68.75,55.9 T14.3 68.75,59.86 69.6,60.71 69.6,68.83 66.55,71.88 63.25,71.88 62.74,72.39 R52.2
N$49
  Bottom 1.27: FAN1.2 55.1,42.74 C8.2 58.32,41.32 D6.A 64.43,41.32 65.53,42.42 65.53,44.2 67.31,45.97 Q2.2
N$50
  Bottom 0.406: R54.2 52.07,74.35 RST1.2 RST1.1
NRST  (via drill 0.6)
  Top 0.406: ESP8266.9 17.78,83.31 v17.02,82.55
  Bottom 0.406: R26.1 21.66,78.99 C4.2 18.97,79.01 T1.C 17.27,81.79 17.02,82.04 v17.02,82.55 3.56,82.55 1.78,80.77 R23.1
NRST1  (via drill 0.6)
  Top 0.406: ESP1.9 68.07,83.31 v67.31,82.55
  Bottom 0.406: R37.1 71.95,78.99 C7.2 69.26,79.01 T9.C 67.56,81.79 67.31,82.04 v67.31,82.55 53.85,82.55 52.07,80.77 R54.1
P1
  Top 2.54: RIN1.2 89.07,7.95 81.53,15.49 RELAY_NO1.C
P230
  Top 2.54: RIN.2 38.78,7.95 31.24,15.49 RELAY_NO.C
R1
  Top 2.54: ROUT3.2 92.63,61.13 91.44,59.94 91.44,48.94 | 91.44,48.94 91.44,39.12 92.81,37.75 RELAY_NC1.NC | ROUT4.2 91.44,48.94
R230
  Top 2.54: ROUT1.2 42.34,61.13 41.15,59.94 41.15,48.94 | 41.15,48.94 41.15,39.12 42.51,37.75 RELAY_NC.NC | ROUT2.2 41.15,48.94
RELAY  (via drill 0.6)
  Top 0.406: v25.65,65.28 25.91,65.53 25.91,70.1 22.7,73.31 ESP8266.14
  Bottom 0.406: v25.65,65.28 26.16,64.77 28.96,64.77 30.23,63.5 30.23,60.2 28.96,58.93 23.37,58.93 22.35,57.91 22.35,41.66 18.86,38.17 R13.2 | R13.2 18.86,19.43 R11.2 | R12.1 18.8,25.97 R13.2
RELAY1  (via drill 0.6)
  Top 0.406: v75.95,65.28 76.2,65.53 76.2,70.1 72.99,73.31 ESP1.14
  Bottom 0.406: v75.95,65.28 76.45,64.77 79.25,64.77 80.52,63.5 80.52,60.2 79.25,58.93 73.66,58.93 72.64,57.91 72.64,41.66 69.15,38.17 R39.2 | R39.2 69.15,19.43 R41.2 | R46.1 69.09,25.97 R39.2
RST
  Bottom 0.406: T1.E 23.11,80.84 R4.2 23.18,79.94 23.88,79.25 40.89,79.25 ISP.5
RST1
  Bottom 0.406: T9.E 73.41,80.84 R30.2 73.47,79.94 74.17,79.25 91.19,79.25 ISP1.5
RXD  (via drill 0.6)
  Top 0.254: 41.15,82.04 42.67,82.04
  Top 0.406: 41.15,82.04 40.64,82.04 39.91,81.31 ESP8266.7 33.05,81.31 28.19,76.45 28.19,64.26 26.42,62.48 18.16,62.48 v18.03,62.36 | 42.67,82.04 43.18,82.04 ISP.4
  Bottom 0.406: SENSOR_CONN.1 v18.03,62.36
RXD1  (via drill 0.6)
  Top 0.254: 91.44,82.04 92.96,82.04
  Top 0.406: 91.44,82.04 90.93,82.04 90.2,81.31 ESP1.7 83.34,81.31 78.49,76.45 78.49,64.26 76.71,62.48 68.45,62.48 v68.33,62.36 | 92.96,82.04 93.47,82.04 ISP1.4
  Bottom 0.406: SENSOR_CONN1.1 v68.33,62.36
TXD
  Top 0.406: ESP8266.8 ISP.1 | ESP8266.8 | ESP8266.8 34.03,83.31 27.43,76.71 27.43,64.52 26.16,63.25 17.78,63.25 17.02,62.48 17.02,57.4 15.24,55.63 12.95,55.63 12.57,56.01 SENSOR_CONN.6
TXD1
  Top 0.406: ESP1.8 ISP1.1 | ESP1.8 | ESP1.8 84.33,83.31 77.72,76.71 77.72,64.52 76.45,63.25 68.07,63.25 67.31,62.48 67.31,57.4 65.53,55.63 63.25,55.63 62.87,56.01 SENSOR_CONN1.6

## Text on the board
bNames: - | +
_tNames: PWR | RELAY | FAN | ALARM | ACT | PWR | RELAY | FAN | ALARM | ACT | ISP | ISP | RST | R5 | RST | R5 | R16 | R22 | R16 | R22 | R1 | PROG | R1 | PROG | ESP8266 | ESP8266 | 3V3 | 3V3 | ISPPWR | ROUT1 | ISPPWR | ROUT1 | SENSOR_CONN | HIGH | SENSOR_CONN | HIGH | FAN | ALARM | ROUT2 | FAN | ALARM | ROUT2 | C2 | C2 | Q1 | Q1 | PWR_SUPPLY | PWR_SUPPLY | RELAY_NC | RELAY_NC | PWR | PWR | RELAY_NO | RELAY_NO | RIN | RIN | PWRJACK | PWRJACK
_bNames: ESP8266 INCUBATOR v0.1.1 | ESP8266 INCUBATOR v0.1.1 | mqopen.org | mqopen.org | T1 | R3 | T2 | T1 | R3 | T2 | R23 | R4 | R23 | R4 | C4 | R26 | C4 | R26 | R17 | R10 | R2 | R17 | R10 | R2 | R27 | R27 | R25 | R25 | R24 | R24 | R6 | R7 | R6 | R7 | C3 | C3 | - | R18 | R18 | T3 | T3 | R19 | R21 | R20 | R19 | R21 | R20 | + | R9 | R8 | R9 | R8 | - | - | T8 | T8 | - | - | C1 | D1 | C1 | D1 | + | + | + | + | T7 | T7 | R15 | D3 | R15 | D3 | R12 | T6 | R12 | T6 | R13 | R14 | R13 | R14 | T5 | T5 | R11 | R11 | D2 | D2 | + | - | + | -